# Altium PCB Smart_AC_Meter.PcbDoc
Units mm, origin at the board's own origin, x right, y up, seen from the top; angles counter-clockwise.
Board outline 100 x 70 mm, 2 copper layers (Top Layer, Bottom Layer); 42 components, 21 nets, 143 pads, 93 vias.
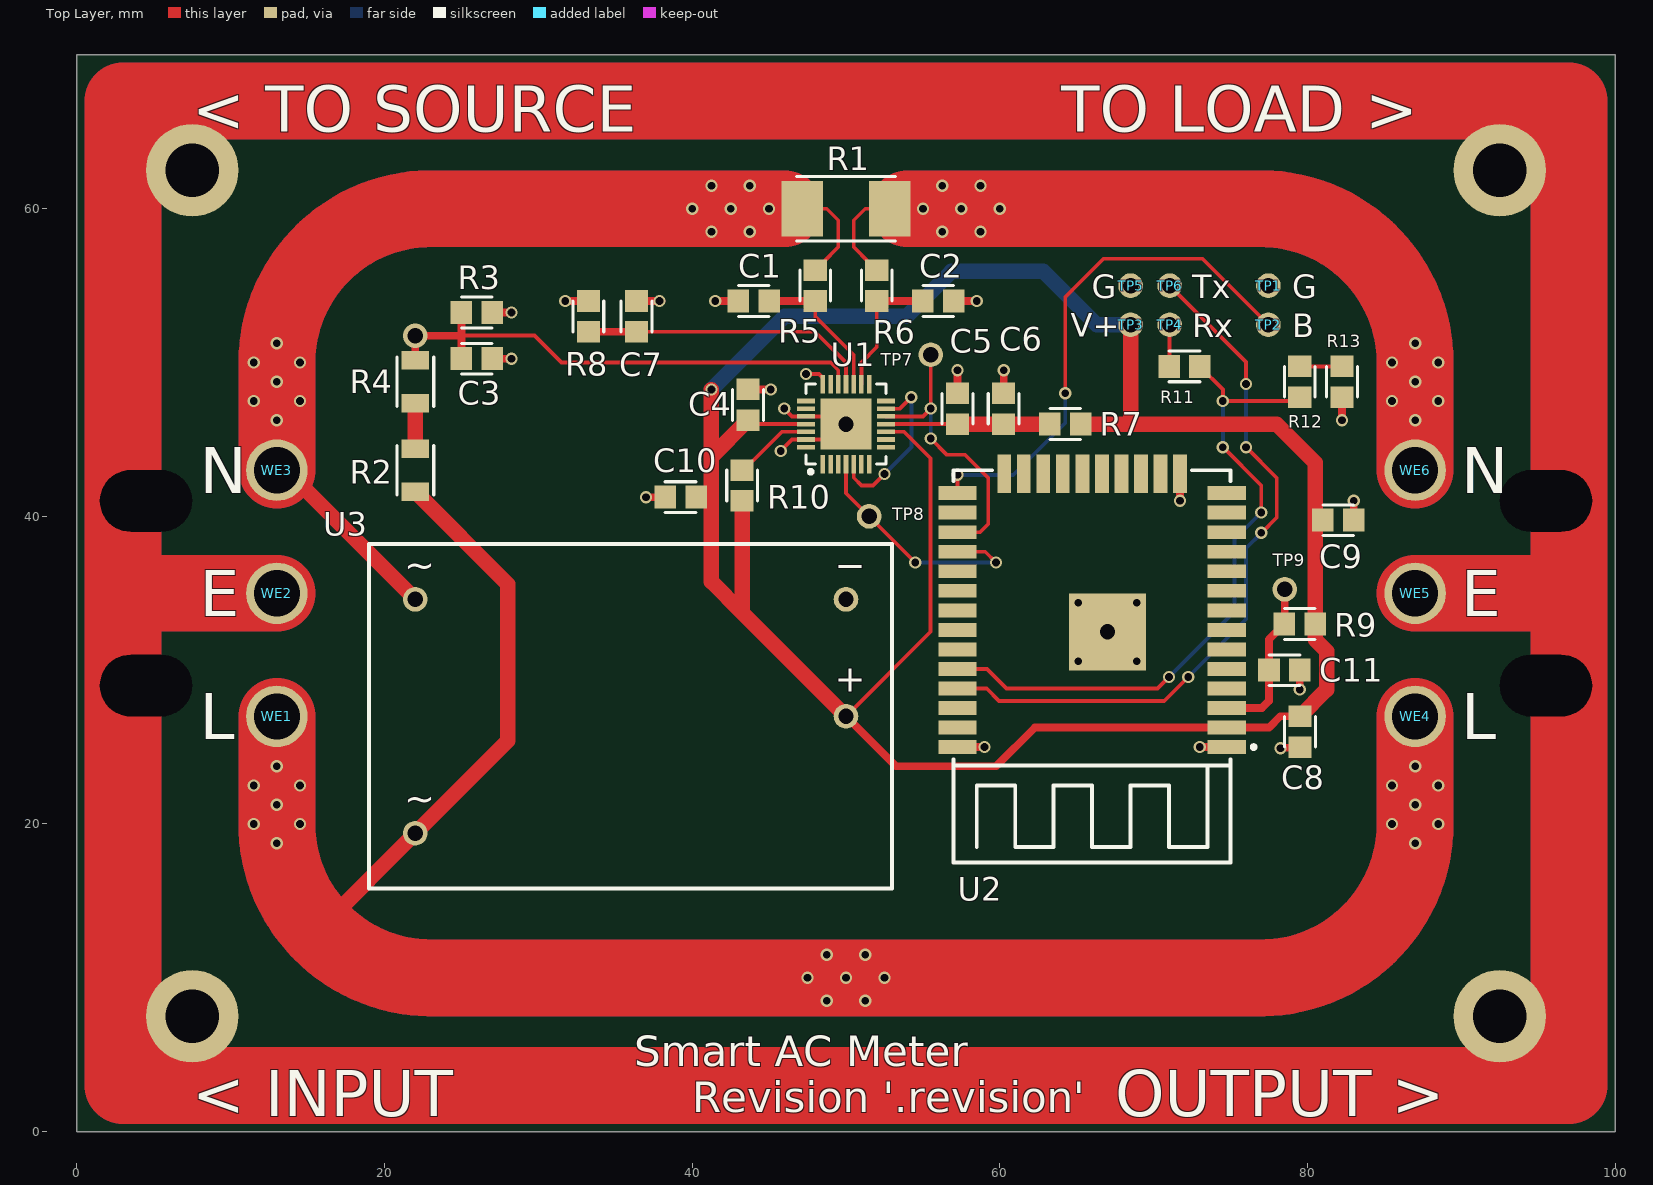
[diagram p0: Top Layer view]
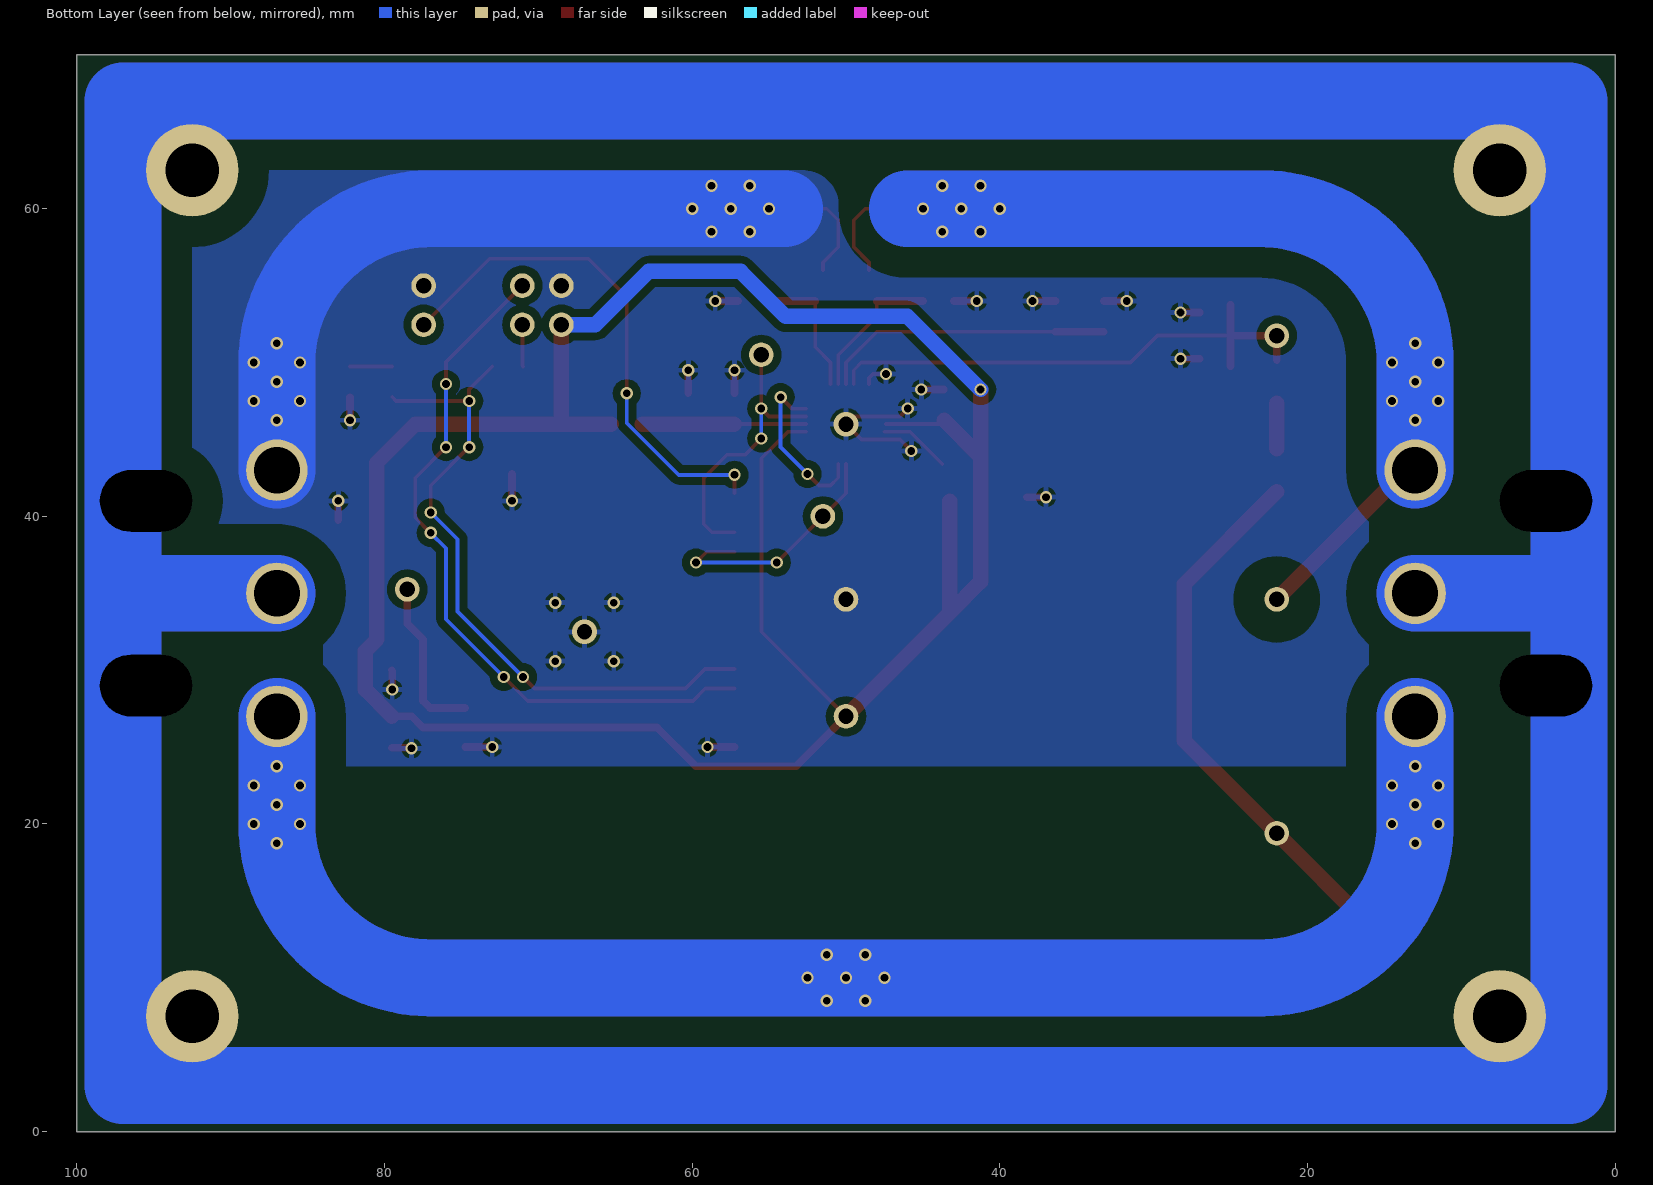
[diagram p1: Bottom Layer view, seen from below]

## Layer stack, top to bottom
Top Solder: solder mask 0.0102, Solder Resist, Dk 3.5
Top Layer: signal copper 0.0356
Dielectric 1: dielectric 0.32, FR-4, Dk 4.8
Bottom Layer: signal copper 0.0356
Bottom Solder: solder mask 0.0102, Solder Resist, Dk 3.5

## Board outline
0,0 0,70 100,70 100,0

## Design rules (kind name [scope] priority, off if disabled: settings)
Clearance Clearance_5 [InNamedPolygon('V_3V3_L01_P002')] p1: gap=0.254 ignorepadtopadclearanceinfootprint=FALSE except(0: Arc-Hole Track-Hole SMDPad-Hole THPad-Hole Via-Hole Fill-Hole Poly-Hole Region-Hole Text-Hole)
Clearance Clearance_2 [InNamedPolygon('GND_L02_P000') vs InNet('EARTH')] p2: gap=2 ignorepadtopadclearanceinfootprint=FALSE
Clearance Clearance_4 [InNamedPolygon('GND_L02_P000') vs InNet('AC Neutral In')] p3: gap=2 ignorepadtopadclearanceinfootprint=FALSE
Clearance Clearance_3 [InNamedPolygon('GND_L02_P000') vs InNet('AC Live')] p4: gap=2 ignorepadtopadclearanceinfootprint=FALSE
Clearance Clearance_1 [InNamedPolygon('GND_L02_P000')] p5: gap=0.5 ignorepadtopadclearanceinfootprint=FALSE
Clearance [All] p6: gap=0.1 ignorepadtopadclearanceinfootprint=FALSE
HoleSize [All] p1: absolutevalues=TRUE maxlimit=6 minlimit=0.025 maxpercent=80.000 minpercent=20.000
MinimumSolderMaskSliver [All] p1: minsoldermaskwidth=0.1
PolygonConnect PolygonConnect_1 [All vs IsNamedPolygon('V_3V3_L01_P002')] p1: connectstyle=Relief reliefconductorwidth=0.35 reliefentries=4 polygonreliefangle="90 Angle" airgapwidth=0.25
PolygonConnect [All] p2: thpad.connectstyle=Direct thpad.reliefconductorwidth=0.254 thpad.reliefentries=4 thpad.polygonreliefangle="90 Angle" thpad.airgapwidth=0.254 smdpad.connectstyle=Direct smdpad.reliefconductorwidth=0.254 smdpad.reliefentries=4 smdpad.polygonreliefangle="90 Angle" smdpad.airgapwidth=0.254 via.connectstyle=Relief via.reliefconductorwidth=0.35 via.reliefentries=4 via.polygonreliefangle="90 Angle" via.airgapwidth=0.25
RoutingVias [All] p1: holewidth=0.5 width=0.6 viastyle="Through Hole" minholewidth=0.5 minwidth=0.8 maxholewidth=2.5 maxwidth=4
SilkToSilkClearance [All] p1: silktosilkclearance=0.01
SilkToSolderMaskClearance [IsPad] p1: minsilkscreentomaskgap=0.1 clearancetoexposedcopper=TRUE
SolderMaskExpansion [All] p1: expansion=0.102
Width [All] p1: maxlimit=10 minlimit=0.2 preferedwidth=0.254 minimp=50.000000 maximp=50.000000 favimp=50.000000
26 further rules are at their usual default settings.

## Components (designator, comment, footprint, x,y, rotation, side; value= is the part's Value field where it differs from the comment)
C1 "Capacitor" 0805 44,54 r180 top
C2 "Capacitor" 0805 56,54 r0 top
C3 "Capacitor" 0805 26,50.25 r0 top
C4 "Capacitor" 0805 43.625,47.25 r90 top
C5 "Capacitor" 0805 57.25,47 r90 top
C6 "Capacitor" 0805 60.25,47 r90 top
C7 "Capacitor" 0805 36.375,53 r90 top
C8 "Capacitor" 0805 79.52,26 r270 top
C9 "Capacitor" 0805 82,39.75 r180 top
C10 "Capacitor" 0805 39.25,41.25 r0 top
C11 "Capacitor" 0805 78.5,30 r0 top
R1 "Resistor" 2512 50,60 r0 top
R2 "Resistor" 1206 22,43 r90 top
R3 "Resistor" 0805 26,53.25 r0 top
R4 "Resistor" 1206 22,48.75 r90 top
R5 "Resistor" 0805 48,55 r270 top
R6 "Resistor" 0805 52,55 r270 top
R7 "Resistor" 0805 64.25,46 r0 top
R8 "Resistor" 0805 33.25,53 r270 top
R9 "Resistor" 0805 79.5,33 r180 top
R10 "Resistor" 0805 43.25,42 r270 top
R11 "Resistor" 0805 72,49.75 r0 top
R12 "Resistor" 0805 79.5,48.75 r270 top
R13 "Resistor" 0805 82.25,48.75 r90 top
TP1 "Via" 1mmVia#1 81.25,54.5 r0 top
TP2 "Via" 1mmVia#2 77.46,52.5 r90 top
TP3 "Via" 1mmVia#3 68.5,52.46 r90 top
TP4 "Via" 1mmVia#3 71.04,52.46 r90 top
TP5 "Via" 1mmVia#3 68.5,55 r90 top
TP6 "Via" 1mmVia#3 71.04,55 r90 top
TP7 "Via" 1mmVia#3 55.51,50.5 r0 top
TP8 "Via" 1mmVia#3 51.5,40 r0 top
TP9 "Via" 1mmVia#3 78.52,35.25 r0 top
U1 "MCP39F511" MCP39F511 50,46 r90 top
U2 "ESP32-WROOM-32D" ESP32-WROOM-32D 66,25 r180 top
U3 "IRM-02-3.3" IRM-02-3.3 36,27 r0 top
WE1 "Wire Entry" 12AWGWireEntry#1 15,22 r0 top
WE2 "Wire Entry" 12AWGWireEntry#1 15,30 r0 top
WE3 "Wire Entry" 12AWGWireEntry#1 15,38 r0 top
WE4 "Wire Entry" 12AWGWireEntry#2 85,22 r0 top
WE5 "Wire Entry" 12AWGWireEntry#2 85,30 r0 top
WE6 "Wire Entry" 12AWGWireEntry#2 85,38 r0 top

## Footprints (in the part's own frame and the unit in brackets; to place one, negate y for a bottom-side part, rotate by r counter-clockwise, add the part's x,y. Pads: shape width x height; smd on the part's side, far side on the other; paste and mask are expansions set on the pad)
1mmVia#1 [mm]
  round 1.6 hole 1: 1(-3.79,0.5)
1mmVia#2 [mm]
  round 1.6 hole 1: 1(-0.04,0)
1mmVia#3 [mm]
  round 1.6 hole 1: 1(0,0)
12AWGWireEntry#1 [mm]
  round 4 hole 3: 1(-2,5)
12AWGWireEntry#2 [mm]
  round 4 hole 3: 1(2,5)
0805 [mm] "Chip Resistor, Body 2.0x1.2mm, IPC Low Density"
  rect 1.4x1.5 smd: 1(-1,0) 2(1,0)
  silkscreen extent -1,-1 1,1, body extent -1.07,-0.7 1.07,0.7, height 0.7
1206 [mm] "Chip Resistor, Body 3.2x1.6mm"
  rect 1.2x1.8 smd: 1(-1.4,0) 2(1.4,0)
  silkscreen extent -1.6,-1.2 1.6,1.2, body extent -1.6,-0.8 1.6,0.8, height 0.7
2512 [mm] "Chip Resistor, Body 6.4x3.2mm, IPC Low Density"
  rect 2.7x3.6 smd: 1(-2.85,0) 2(2.85,0)
  silkscreen extent -3.2,-2.1 3.2,2.1, body extent -3.2,-1.6 3.2,1.6, height 0.7
ESP32-WROOM-32D [mm]
  rect 2.5x0.9 smd: 1(-8.75,0) 2(-8.75,-1.27) 3(-8.75,-2.54) 4(-8.75,-3.81) 5(-8.75,-5.08) 6(-8.75,-6.35) 7(-8.75,-7.62) 8(-8.75,-8.89) 9(-8.75,-10.16) 10(-8.75,-11.43) 11(-8.75,-12.7) 12(-8.75,-13.97) 13(-8.75,-15.24) 14(-8.75,-16.51) 25(8.75,-16.51) 26(8.75,-15.24) 27(8.75,-13.97) 28(8.75,-12.7) 29(8.75,-11.43) 30(8.75,-10.16) 31(8.75,-8.89) 32(8.75,-7.62) 33(8.75,-6.35) 34(8.75,-5.08) 35(8.75,-3.81) 36(8.75,-2.54) 37(8.75,-1.27) 38(8.75,0)
  rect 0.9x2.5 smd: 15(-5.715,-17.76) 16(-4.445,-17.76) 17(-3.175,-17.76) 18(-1.905,-17.76) 19(-0.635,-17.76) 20(0.635,-17.76) 21(1.905,-17.76) 22(3.175,-17.76) 23(4.445,-17.76) 24(5.715,-17.76)
  rect 5x5 smd: 39(-1,-7.49)
  silkscreen extent -10.6,-18 9,7.5, body extent -9.04,-17.99 9.03,7.55, height 3.04
IRM-02-3.3 [mm]
  round 1.6 hole 1: 1(-14,-7.6) 12(14,0) 13(14,7.6) 24(-14,7.6)
  silkscreen extent -17,-11.2 17,11.2, body extent -16.9,-11.1 16.9,11.1, height 15
MCP39F511 [mm]
  rect 1.2x0.3 smd: 1(-2.6,1.5) 2(-2.6,1) 3(-2.6,0.5) 4(-2.6,0) 5(-2.6,-0.5) 6(-2.6,-1) 7(-2.6,-1.5) 15(2.6,-1.5) 16(2.6,-1) 17(2.6,-0.5) 18(2.6,0) 19(2.6,0.5) 20(2.6,1) 21(2.6,1.5)
  rect 0.3x1.2 smd: 8(-1.5,-2.6) 9(-1,-2.6) 10(-0.5,-2.6) 11(0,-2.6) 12(0.5,-2.6) 13(1,-2.6) 14(1.5,-2.6) 22(1.5,2.6) 23(1,2.6) 24(0.5,2.6) 25(0,2.6) 26(-0.5,2.6) 27(-1,2.6) 28(-1.5,2.6)
  rect 3.3x3.3 smd: 29(0,0)
  silkscreen extent -3.2,-2.6 2.6,2.6, body extent -2.5,-2.5 2.5,2.5, height 1

## Part data
C1 C2 C3 C4 C6 C7 C8 C11: "AVX Corporation 08055D104KAT2A", Capacitance="0.1 µF", Digikey Part Number=478-12790-1-ND, Package="0805 (2012 Metric)", Tolerance=±10%, Unique Part Number=LM_CAP_0001, Voltage="50 V", Manufacturer Part Number="AVX Corporation 08055D104KAT2A", Type (Ceramic, Aluminium, etc#)="Ceramic X5R"
C5 C9 C10: library part "Taiyo Yuden TMK212BBJ106KG-T", Capacitance="10 µF", Digikey Part Number=587-2985-1-ND, Package="0805 (2012 Metric)", Tolerance=±10%, Unique Part Number=LM_CAP_0002, Voltage="25 V", Manufacturer Part Number="Taiyo Yuden TMK212BBJ106KG-T", Type (Ceramic, Aluminium, etc#)="Ceramic X5R"
R1: library part "2 mR 2512 (6432 Metric) Chip", Digikey Part Number=696-1836-1-ND, Manufacturer Part Number="Riedon CSRL3-0R002F8", Package="2512 (6432 Metric)", Power="3 W", Resistance="2 mR", Tolerance=0.01, Unique Part Number=LM_RES_0002, Type (Chip, Axial, etc#)=Chip
R2 R4: library part "499 kR 1206 (3216 Metric) Chip", Digikey Part Number=RMCF1206FT499KCT-ND, Manufacturer Part Number="Stackpole Electronics Inc RMCF1206FT499K", Package="1206 (3216 Metric)", Power="0.25 W", Resistance="499 kR", Tolerance=0.01, Unique Part Number=LM_RES_0003, Type (Chip, Axial, etc#)=Chip
R3 R5 R6 R8: library part "1 kR 0805 (2012 Metric) Chip", Digikey Part Number=RMCF0805FT1K00CT-ND, Manufacturer Part Number="Stackpole Electronics Inc RMCF0805FT1K00", Package="0805 (2012 Metric)", Power="0.125 W", Resistance="1 kR", Tolerance=0.01, Unique Part Number=LM_RES_0001, Type (Chip, Axial, etc#)=Chip
R7: library part "10 R 0805 (2012 Metric) Chip", Digikey Part Number=RMCF0805FT10R0CT-ND, Manufacturer Part Number="Stackpole Electronics Inc RMCF0805FT10R0", Package="0805 (2012 Metric)", Power="0.125 W", Resistance="10 R", Tolerance=0.01, Unique Part Number=LM_RES_0004, Type (Chip, Axial, etc#)=Chip
R9 R10 R11 R12 R13: library part "10 kR 0805 (2012 Metric) Chip", Digikey Part Number=RMCF0805FT10K0CT-ND, Manufacturer Part Number="Stackpole Electronics Inc RMCF0805FT10K0", Package="0805 (2012 Metric)", Power="0.125 W", Resistance="10 kR", Tolerance=0.01, Unique Part Number=LM_RES_0005, Type (Chip, Axial, etc#)=Chip
TP1 TP2 TP3 TP4 TP5 TP6 TP7 TP8 TP9: "1mm dia via/through hole", Unique Part Number=LM_OTH_0002
U1: "Single Phase Meter IC 28-QFN (5x5)", Digikey Part Number=MCP39F511-E/MQ-ND, Manufacturer Part Number="Microchip Technology MCP39F511-E/MQ", Package="28-QFN (5x5)", Temperature Range="-40°C ~ 125°C", Unique Part Number=LM_IC_0001
U2: "Bluetooth, WiFi,3 Transceiver Module", Digikey Part Number=1904-1023-1-ND, Manufacturer Part Number="Espressif Systems ESP32-WROOM-32D", Package="38-SMD Module", Temperature Range="-40°C ~ 85°C", Unique Part Number=LM_IC_0002
U3: "Enclosed AC DC Converter 1 Output 3.3V 600mA", Digikey Part Number=1866-3007-ND, Manufacturer Part Number="MEAN WELL USA Inc. IRM-02-3.3", Package="4-DIP Module", Temperature Range="-30°C ~ 85°C (With Derating)", Unique Part Number=LM_IC_0003
WE1 WE2 WE3 WE4 WE5 WE6: "12 AWG Wire Entry", Unique Part Number=LM_OTH_0001

## Free pads (board coordinates)
  rrect100% 5x3 hole 4 slot 6 at 0 deg unplated: 2(4.5,29) 2(4.5,41) 2(95.5,29) 2(95.5,41)
  round 6 hole 3.5: 2(7.5,7.5) 2(7.5,62.5) 2(92.5,7.5) 2(92.5,62.5)

## Via types
v1: diameter 0.8, hole 0.5, Top Layer to Bottom Layer, 90 vias
v2: diameter 1.6, hole 1, Top Layer to Bottom Layer, 3 vias

## Nets (pads, with @x,y where several pads share a name; then routed paths per layer and width w, separated by ;. In a path a pad name is that pad's centre, name@x,y a point inside that pad or via, vN(x,y) a via of type N, cw(c..) or ccw(c..) an arc to the next point about the centre after c; other vN are vias at no path point)
"AC Live": R2.1 U3.1 WE1.1 WE4.1 | length 235.5
  Top Layer w1: 15.477,13.417 16.017,13.417 U3.1 28,25.4 28,35.6 R2.1
  Top Layer w5: WE1.1 13,20.008 ccw(c23.008,20.008) 15.477,13.417 ccw(c23.008,20.008) 23.008,10 33,10 76.992,10 ccw(c76.992,20.008) 87,20.008 WE4.1
  Bottom Layer w1: 15.477,13.417 16.017,13.417
  Bottom Layer w5: WE1.1 13,20.008 ccw(c23.008,20.008) 15.477,13.417 ccw(c23.008,20.008) 23.008,10 33,10 76.992,10 ccw(c76.992,20.008) 87,20.008 WE4.1
  other v1: 48.75,8.5 51.25,8.5 47.5,10 50,10 52.5,10 48.75,11.5 51.25,11.5 13,18.75 87,18.75 11.5,20 14.5,20 85.5,20 88.5,20 13,21.25 87,21.25 11.5,22.5 14.5,22.5 85.5,22.5 88.5,22.5 13,23.75 87,23.75
"AC Neutral In": R1.1 R5.1 U3.24 WE3.1 | length 110.2
  Top Layer w0.25: R1.1 48.75,60 49.5,59.25 49.5,57.5 48.5,56.5 R5.1@48.5,56
  Top Layer w1: WE3.1 13.6,43 U3.24
  Top Layer w5: WE3.1 13,49.992 cw(c23.008,49.992) 23.008,60 R1.1@46,60
  Bottom Layer w5: WE3.1 13,49.992 cw(c23.008,49.992) 23.008,60 46,60
  other v1: 13,46.25 11.5,47.5 14.5,47.5 13,48.75 11.5,50 14.5,50 13,51.25 41.25,58.5 43.75,58.5 40,60 42.5,60 45,60 41.25,61.5 43.75,61.5
"AC Neutral Out": C1.2 C2.2 C3.2 C4.2 C5.2 C6.2 C7.2 C8.2 C9.1 C10.1 C11.2 R1.2 R3.2 R6.1 R8.1 R13.1 TP1.1 TP5.1 U1.21 U1.24 U1.27 U1.29 U2.1 U2.15 U2.38 U2.39 U3.13 WE6.1 | length 133.5
  Top Layer w0.25: v1(45.75,44.25) 46.5,45 U1.27 49,45 v2(50,46) 49.5,46.5 U1.24 46.5,46.5 v1(45.99,47.01) ; v1(47.4,49.25) 48.25,49.25 48.5,49 U1.21 ; R6.1@51.5,56 51.5,56.5 50.5,57.5 50.5,59.25 51.25,60 R1.2
  Top Layer w0.5: C3.2 v1(28.25,50.25) ; R3.2 v1(28.25,53.25) ; v1(31.75,54) R8.1 ; C7.2 v1@38,54 ; v1(37,41.25) C10.1 ; v1(41.5,54) C1.2 ; C4.2@43.65,48.25 v1@45,48.25 ; C2.2 v1(58.5,54) ; U2.38 v1(59,25) ; C5.2 v1(57.25,49.5) ; C6.2 v1(60.25,49.5) ; v1(71.715,41.01) U2.15 ; v1(73,25) U2.1 ; v1@78.25,24.96 C8.2@79.52,24.96 ; v1(79.5,28.75) 79.5,29.96 C11.2@79.54,30 ; v1(82.25,46.25) R13.1 ; C9.1 v1(83,41.01)
  Top Layer w5: R1.2@54,60 76.992,60 cw(c76.992,49.992) 87,49.992 WE6.1
  Bottom Layer w5: 54,60 76.992,60 cw(c76.992,49.992) 87,49.992 WE6.1
  other v1: 78.25,24.92 65.1,30.59 68.9,30.59 65.1,34.39 68.9,34.39 87,46.25 85.5,47.5 88.5,47.5 45.1,48.25 87,48.75 85.5,50 88.5,50 87,51.25 37.875,54 56.25,58.5 58.75,58.5 55,60 57.5,60 60,60 56.25,61.5 58.75,61.5
  other v2: 67,32.49
"AC V Sense": C3.1 R3.1 R4.2 U1.19 | length 34.9
  Top Layer w0.25: 25,51.75 29.75,51.75 31.508,49.992 49.008,49.992 49.5,49.5 U1.19
  Top Layer w0.5: R4.2 v2(22,51.75) 25,51.75 ; C3.1@25,49.75 25,51.75 ; R3.1@25,53.75 25,51.75
B\O\O\T\L\O\A\D\E\R\: TP2.1 U2.25 | length 34
  Top Layer w0.25: U2.25 v1(57.25,42.698) ; v1(64.25,48) 64.25,54.25 66.75,56.75 73.17,56.75 TP2.1 ; TP2.1@77.29,52.46 TP2.1 ; TP2.1@77.5,52.46 TP2.1
  Bottom Layer w0.25: v1(57.25,42.698) 60.873,42.698 64.25,46.075 v1(64.25,48)
BOOT_UART_UC_RX: R11.1 TP4.1 | length 2.7
  Top Layer w0.25: R11.1 71.04,49.79 TP4.1
BOOT_UART_UC_TX: TP6.1 U2.35 | length 46.7
  Top Layer w0.25: U2.35 59.148,28.81 59.958,28 70.69,28 v1(72.25,29.56) ; TP6.1@71.04,55 76,50.04 v1(76,48.6) ; v1(76,44.5) 78,42.5 78,39.926 v1(77,38.926)
  Bottom Layer w0.25: v1(72.25,29.56) 76,33.31 76,37.926 v1(77,38.926) ; v1(76,44.5) v1(76,48.6)
EARTH: pad.2 WE2.1 WE5.1 | length 672
  Top Layer w5: WE2.1 3,35 ; WE5.1 97,35 ; 3,35 3,67 97,67 97,30 97,3 3,3 3,35
  Bottom Layer w5: 3,35 WE2.1 ; WE5.1 97,35 ; 3,3 3,67 97,67 97,30 97,3 3,3
METER_UART_UC_RX: TP7.1 U1.12 U2.27 | length 18.6
  Top Layer w0.25: U1.12 55,46.5 v1(55.51,47.01) TP7.1 ; v1(55.51,45.062) 56.572,44 57.75,44 59.25,42.5 59.25,39.5 58.72,38.97 U2.27
  Bottom Layer w0.25: v1(55.51,45.062) v1(55.51,47.01)
METER_UART_UC_TX: TP8.1 U1.4 U2.28 | length 16.3
  Top Layer w0.25: U1.4 50,41.5 v1(54.5,37) ; U2.28 59.05,37.7 v1(59.75,37)
  Bottom Layer w0.25: v1(54.5,37) v1(59.75,37)
NetC1_1: C1.1 R5.2 U1.17 | length 9.4
  Top Layer w0.25: R5.2 48,53 50.5,50.5 U1.17
  Top Layer w0.5: C1.1 R5.2
NetC2_1: C2.1 R6.2 U1.16 | length 8.8
  Top Layer w0.25: U1.16 51,50 52,51 R6.2
  Top Layer w0.5: R6.2 C2.1
NetC5_1: C5.1 C6.1 R7.1 U1.11 | length 10.7
  Top Layer w0.25: U1.11 C5.1@57.15,46 ; C5.1@57.15,45.9 C5.1
  Top Layer w1: C5.1 R7.1
NetC7_1: C7.1 R8.2 U1.18 | length 19
  Top Layer w0.25: C7.1 47.992,52 50,49.992 U1.18
  Top Layer w0.5: R8.2 C7.1
NetR2_2: R2.2 R4.1 | length 2.9
  Top Layer w1: R2.2 R4.1
NetR10_1: R10.1 U1.26 | length 4.6
  Top Layer w0.25: R10.1@43.744,43.401 45.843,45.5 46.09,45.5 U1.26@47.5,45.5
NetR11_2: R11.2 R12.2 U2.34 | length 44
  Top Layer w0.25: U2.34 59.17,30.08 60.44,28.81 70.25,28.81 v1(71,29.56) ; R11.2 74.5,48.25 v1(74.5,47.5) 79.25,47.5 R12.2 ; v1(74.5,44.5) 76.992,42.008 v1(76.992,40.25)
  Bottom Layer w0.25: v1(71,29.56) 75.25,33.81 75.25,38.508 v1(76.992,40.25) ; v1(74.5,44.5) v1(74.5,47.5)
NetR12_1: R12.1 R13.2 | length 2.8
  Top Layer w0.25: R12.1 R13.2
NetU1_5: U1.5 U1.13 | length 11.1
  Top Layer w0.25: U1.5 50.5,42.51 51.01,42 51.75,42 v1(52.5,42.75) ; U1.13 53.5,47 v1(54.25,47.75)
  Bottom Layer w0.25: v1(52.5,42.75) 54.25,44.5 v1(54.25,47.75)
R\E\S\E\T\: C11.1 R9.2 TP9.1 U2.3 | length 10.4
  Top Layer w0.5: U2.3 77.04,27.54 77.5,28 C11.1 77.5,32 R9.2 78.52,33.02 TP9.1@78.52,35
V_3V3: C4.1 C8.1 C9.2 C10.2 R7.2 R9.1 R10.2 TP3.1 U1.10 U1.25 U2.2 U3.12 | length 166.3
  Top Layer w0.25: C4.1@43.625,46 U1.25 ; U3.12 55.5,32.5 55.5,43.775 53.775,45.5 U1.10
  Top Layer w0.5: U3.12 53.25,23.75 59.75,23.75 62.27,26.27 U2.2 77.5,26.27 78.23,27 C8.1
  Top Layer w1: v1(41.25,48.25) 41.25,43.875 ; R10.2 43.25,33.75 ; C4.1 41.25,43.875 ; U3.12 43.25,33.75 ; R7.2 68.5,46 ; TP3.1@68.5,52.46 68.5,46 ; C8.1 81.25,28.73 81.25,31.25 80.5,32 R9.1 80.5,43.5 78,46 68.5,46 ; 41.25,43.875 41.25,35.75 43.25,33.75
  Bottom Layer w1: v1(41.25,48.25) 46,53 53.925,53 56.847,55.922 62.828,55.922 66.29,52.46 TP3.1@68.5,52.46
pads on no net: U1.1 U1.2 U1.3 U1.6 U1.7 U1.8 U1.9 U1.14 U1.15 U1.20 U1.22 U1.23 U1.28 U2.4 U2.5 U2.6 U2.7 U2.8 U2.9 U2.10 U2.11 U2.12 U2.13 U2.14 U2.16 U2.17 U2.18 U2.19 U2.20 U2.21 U2.22 U2.23 U2.24 U2.26 U2.29 U2.30 U2.31 U2.32 U2.33 U2.36 U2.37

## Polygon pours and split planes (outlines as drawn)
"AC Neutral Out" on Bottom Layer "GND_L02_P000" (solid, remove dead copper, pour order 0): 50.164,60.164 50.478,60.164 cw(c52.814,60.164) 52.814,62.5 55.543,62.5 94.346,62.496 94.346,38 88,38 87.488,38.096 84,34.607 84,23.75 16.017,23.75 16.017,54.017 22.164,60.164

## Other copper
Bottom Layer:
  pour cut-out: 49.5,23.75 82.5,23.75 82.5,12.5 49.5,12.5

## Silkscreen, mask and mechanical layers (free items; w line width, h text height)
Top Overlay:
  text "< TO SOURCE" at 7.5,65 h3
  text "TO LOAD >" at 64,65 h3
  text "G" at 65.97,54.17 h1.52
  text "Tx" at 72.52,54.17 h1.52
  text "G" at 79,54.17 h1.52
  text "V+" at 64.62,51.67 h1.52
  text "Rx" at 72.52,51.63 h1.52
  text "B" at 79,51.63 h1.52
  text "N" at 8,41.5 h3
  text "N" at 90,41.5 h3
  text "E" at 8,33.5 h3
  text "E" at 90,33.5 h3
  text "L" at 8,25.5 h3
  text "L" at 90,25.5 h3
  text "Smart AC Meter" at 36.25,4.25 h2
  text "Revision '.revision'" at 40,1.25 h2
  text "< INPUT" at 7.5,1 h3
  text "OUTPUT >" at 67.5,1 h3
Mechanical 1:
  the board outline again, w0.254
Mechanical 13:
  text "PCB Specifications: / 2 Layer PCB / All Copper Layers 1 Oz (0.036 mm) / Finished Thickness 1.6 mm +/-10%" at 0,75 h1.2

## Dimensions
100,70 to 100,0 on Mechanical 13
0,70 to 100,70 on Mechanical 13

## Text inside footprints (layer, text, board x,y; h text height)
U3: Top Overlay "~" at 21.281,35.4 h3; Top Overlay "~" at 21.281,20.2 h3; Top Overlay "+" at 49.28,28 h3; Top Overlay "−" at 49.277,35.4 h3